# EAGLE board snake_game (EAGLE 6.3)
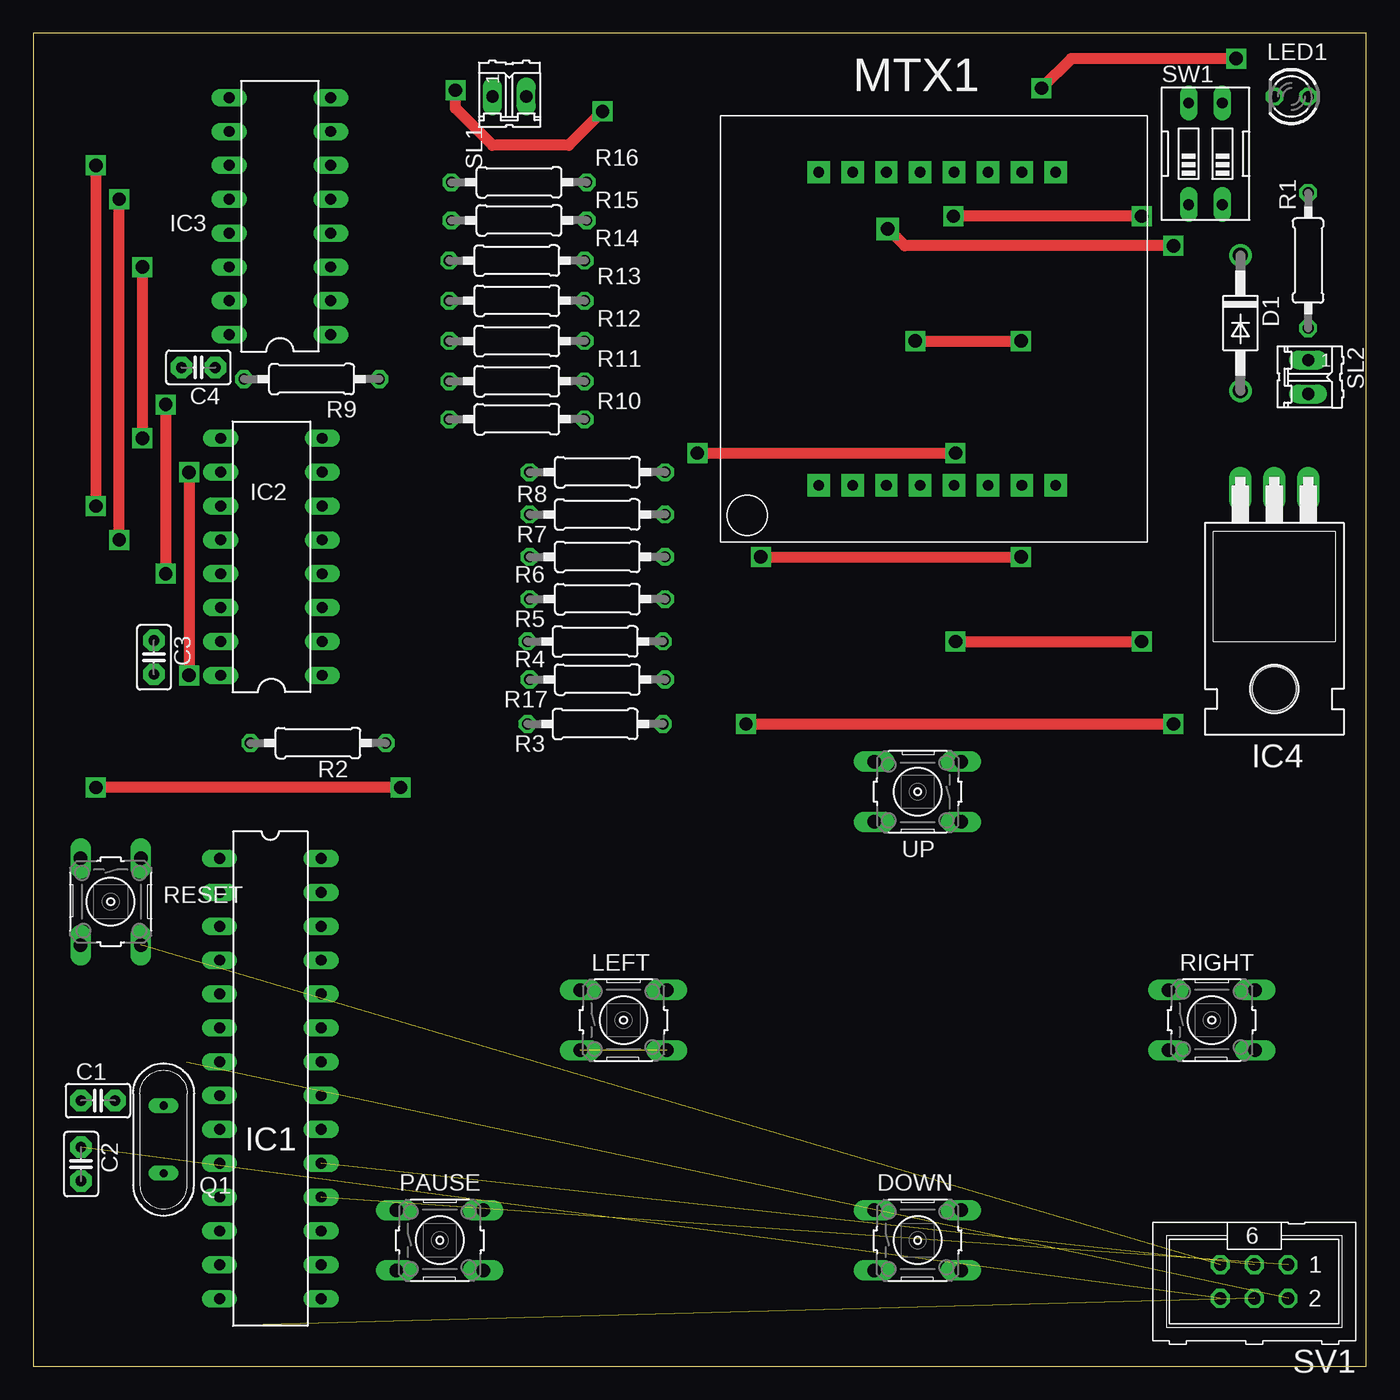
[diagram p0: board, top side]
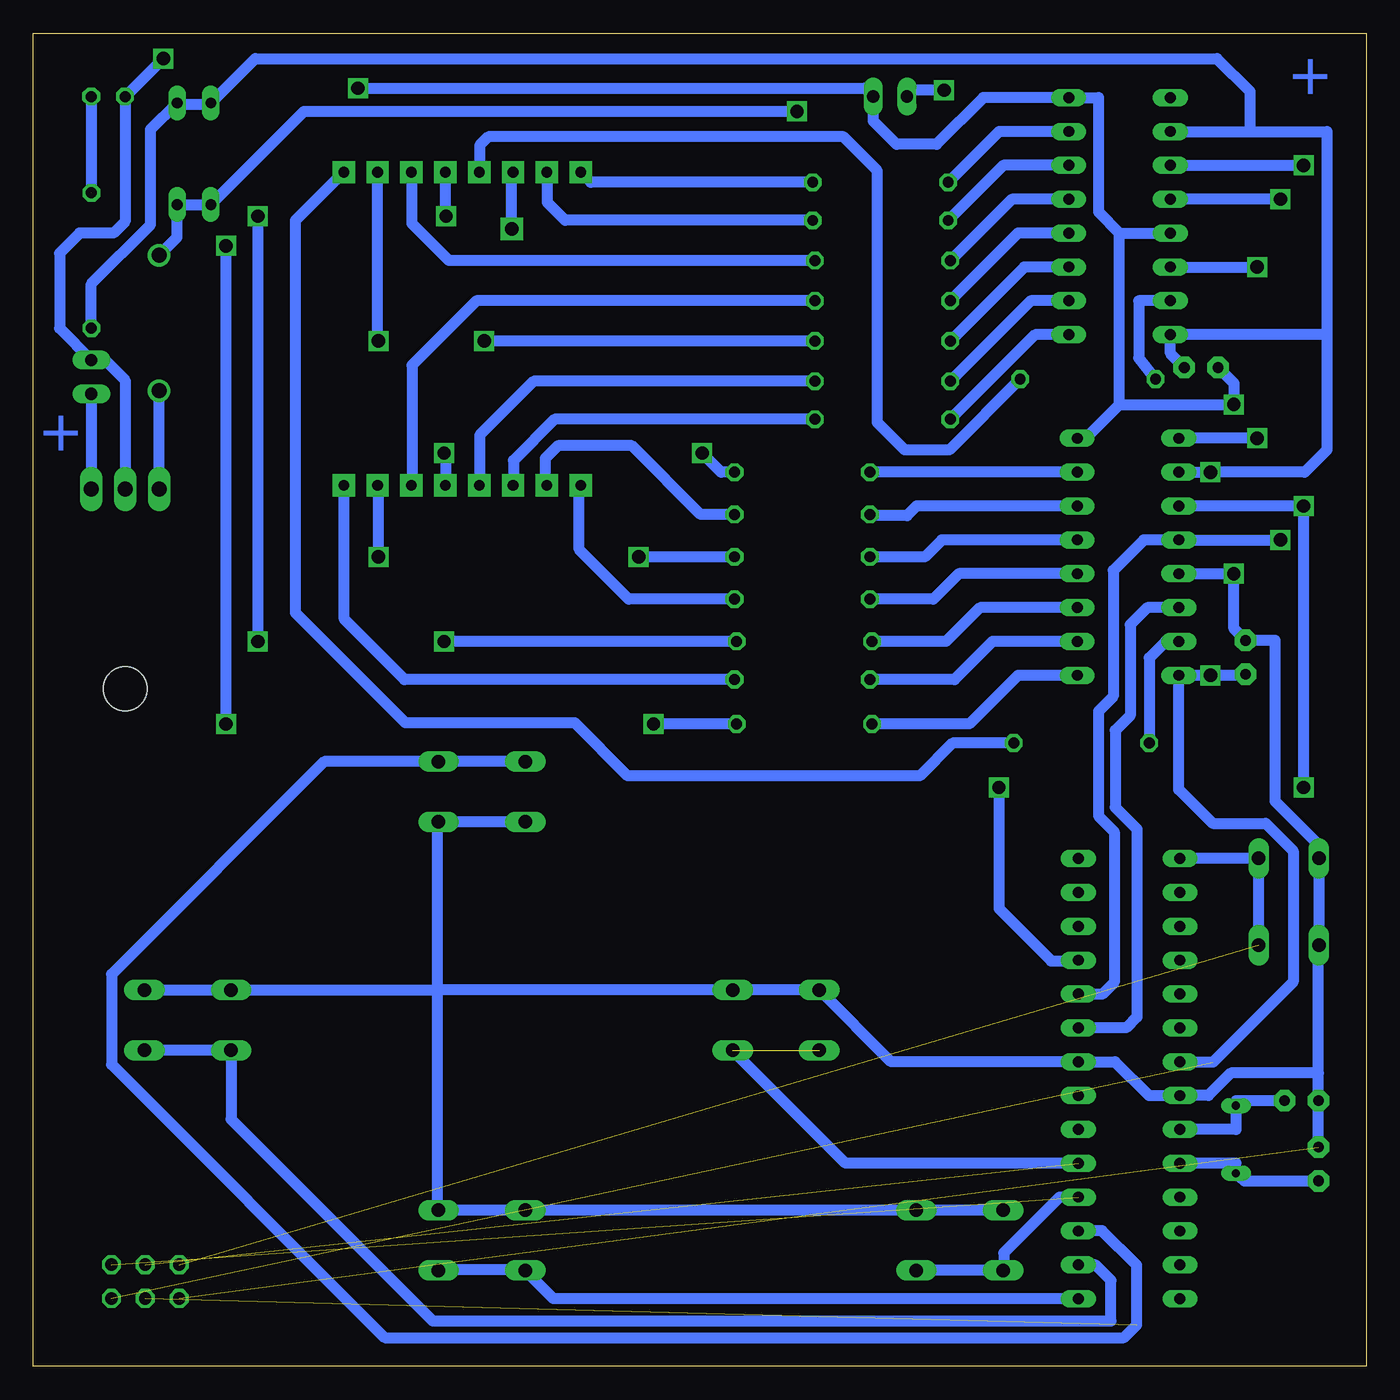
[diagram p1: board, bottom side, seen from below]

Size 100 x 100 mm. Coordinates in mm from the lower left corner, seen from the top.
Outline: 0,0 100,0 100,100 0,100 0,0
Copper layers (1*16): Top 0.035mm / dielectric 1.5mm / Bottom 0.035mm
Design rules "default *": minimum track width 10mil, minimum drill 24mil, track to track 16mil, track to pad 16mil, pad to pad 16mil, via to via 8mil, smd to smd 12mil, copper to edge 40mil, drill to drill 8mil, minimum pad ring 10mil, minimum via ring 8mil, stop-mask expansion 4mil, vias tented up to drill 0mil, thermal gap 10mil

## Footprints (pad centres in the part's own frame; a part is rotated, then mirrored left to right if it is on the bottom)
C2.5-2 = drill 0.813 pad 1.6 octagon: 1 -1.27,0; 2 1.27,0
DO41-10 = drill 1.118: A 5.08,0; C -5.08,0
B3F-10XX = drill 1.016 long: 1 -3.251,2.261; 2 3.251,2.261; 3 -3.251,-2.261; 4 3.251,-2.261
DIL28-3 = drill 0.813 long: 1 -16.51,-3.81; 2 -13.97,-3.81; 3 -11.43,-3.81; 4 -8.89,-3.81; 5 -6.35,-3.81; 6 -3.81,-3.81; 7 -1.27,-3.81; 8 1.27,-3.81; 9 3.81,-3.81; 10 6.35,-3.81; 11 8.89,-3.81; 12 11.43,-3.81; 13 13.97,-3.81; 14 16.51,-3.81; 15 16.51,3.81; 16 13.97,3.81; 17 11.43,3.81; 18 8.89,3.81; 19 6.35,3.81; 20 3.81,3.81; 21 1.27,3.81; 22 -1.27,3.81; 23 -3.81,3.81; 24 -6.35,3.81; 25 -8.89,3.81; 26 -11.43,3.81; 27 -13.97,3.81; 28 -16.51,3.81
DIL16 = drill 0.813 long: 1 -8.89,-3.81; 2 -6.35,-3.81; 3 -3.81,-3.81; 4 -1.27,-3.81; 5 1.27,-3.81; 6 3.81,-3.81; 7 6.35,-3.81; 8 8.89,-3.81; 9 8.89,3.81; 10 6.35,3.81; 11 3.81,3.81; 12 1.27,3.81; 13 -1.27,3.81; 14 -3.81,3.81; 15 -6.35,3.81; 16 -8.89,3.81
TO220H = drill 1.118 long: 1 -2.54,-10.16; 2 0,-10.16; 3 2.54,-10.16 | hole 3.302: 0,4.826
LED3MM = drill 0.813 octagon: A -1.27,0; K 1.27,0
MATRIX_8X8_CPM12088B = drill 0.8 pad 1.676 square: 1 7.36,4.25; 2 9.9,4.25; 3 12.44,4.25; 4 14.98,4.25; 5 17.52,4.25; 6 20.06,4.25; 7 22.6,4.25; 8 25.14,4.25; 9 25.14,27.75; 10 22.6,27.75; 11 20.06,27.75; 12 17.52,27.75; 13 14.98,27.75; 14 12.44,27.75; 15 9.9,27.75; 16 7.36,27.75
QS = drill 0.61 long: 1 -2.54,0; 2 2.54,0
0207/10 = drill 0.813 octagon: 1 -5.08,0; 2 5.08,0
02P = drill 0.914 long: 1 -1.27,0; 2 1.27,0
ML6 = drill 0.914 octagon: 1 -2.54,-1.27; 2 -2.54,1.27; 3 0,-1.27; 4 0,1.27; 5 2.54,-1.27; 6 2.54,1.27
EDG-02 = drill 0.813 long: 1 -1.27,-3.81; 2 1.27,-3.81; 3 1.27,3.81; 4 -1.27,3.81

## Placement (x,y rotation side)
C1  22pF  [C2.5-2]  4.85,19.93 0 top
C2  22pF  [C2.5-2]  3.58,15.16 270 top
C3  22pF  [C2.5-2]  9.05,53.18 270 top
C4  22pF  [C2.5-2]  12.38,74.93 180 top
D1  1N4001  [DO41-10]  90.57,78.26 270 top
DOWN  DOWN  [B3F-10XX]  66.35,9.45 0 top
IC1  MEGA8-P  [DIL28-3]  17.78,21.57 270 top
IC2  74HC595N  [DIL16]  17.87,60.73 90 top
IC3  74HC595N  [DIL16]  18.5,86.28 90 top
IC4  7805T  [TO220H]  93.11,55.64 180 top
LED1  Verde  [LED3MM]  94.39,95.25 180 top
LEFT  LEFT  [B3F-10XX]  44.28,25.96 0 top
MTX1  LED_DOT_MATRIX_8X8_CPM12088B  [MATRIX_8X8_CPM12088B]  51.57,61.84 0 top
PAUSE  PAUSE  [B3F-10XX]  30.5,9.45 0 top
Q1  16MHz  [QS]  9.77,17.01 90 top
R1  330R  [0207/10]  95.64,82.95 90 top
R2  220R  [0207/10]  21.36,46.76 0 top
R3  220R  [0207/10]  42.16,48.18 0 top
R4  220R  [0207/10]  42.16,54.38 0 top
R5  220R  [0207/10]  42.31,57.55 0 top
R6  220R  [0207/10]  42.31,60.73 0 top
R7  220R  [0207/10]  42.31,63.9 0 top
R8  220R  [0207/10]  42.31,67.08 0 top
R9  220R  [0207/10]  20.88,74.06 0 top
R10  220R  [0207/10]  36.28,71.04 0 top
R11  220R  [0207/10]  36.28,73.9 0 top
R12  220R  [0207/10]  36.28,76.92 0 top
R13  220R  [0207/10]  36.28,79.93 0 top
R14  220R  [0207/10]  36.28,82.95 0 top
R15  220R  [0207/10]  36.44,85.97 0 top
R16  220R  [0207/10]  36.44,88.82 0 top
R17  220R  [0207/10]  42.31,51.52 0 top
RESET  RESET  [B3F-10XX]  5.8,34.85 270 top
RIGHT  RIGHT  [B3F-10XX]  88.41,25.96 0 top
SL1  Alimentacao 5V  [02P]  35.72,95.26 0 top
SL2  Alimentacao Regulada  [02P]  95.65,74.22 270 top
SV1  ISP  [ML6]  91.6,6.35 180 top
SW1  [EDG-02]  87.95,90.96 0 top
UP  UP  [B3F-10XX]  66.35,43.1 180 top

## Library data of the parts
C1-C4 = capacitor-wima
D1 = diode
DOWN LEFT PAUSE RESET RIGHT UP = switch-omron; MPN: B3F-1000; OC_FARNELL: 176432; OC_NEWARK: 36M3542
IC1 = atmel; OC_FARNELL: unknown; OC_NEWARK: unknown
IC2 IC3 = 74xx-eu
IC4 = linear
LED1 = led
MTX1 = leddotmatrix8x8
Q1 SW1 = special
R1-R17 = rcl
SL1 SL2 = con-amp-quick; OC_FARNELL: unknown; OC_NEWARK: unknown
SV1 = con-ml; OC_FARNELL: unknown; OC_NEWARK: unknown

## Nets
AVCC: IC1.20
GND: C1.1 C2.1 C3.1 C4.2 DOWN.1 DOWN.2 IC1.8 IC1.22 IC2.8 IC2.13 IC3.8 IC3.13 IC4.2 LED1.K LEFT.1 LEFT.2 PAUSE.1 PAUSE.2 RESET.3 RESET.4 RIGHT.1 RIGHT.2 SL1.2 SL2.1 SV1.6 UP.1 UP.2
N$1: MTX1.9 R2.2
N$2: IC1.1 RESET.1 RESET.2 SV1.5
N$3: C2.2 IC1.10 Q1.1
N$4: C1.2 IC1.9 Q1.2
N$5: IC1.19 LEFT.3 LEFT.4 SV1.3
N$7: DOWN.3 DOWN.4 IC1.15
N$9: IC1.16 RIGHT.3 RIGHT.4
N$11: IC1.17 SV1.4 UP.3 UP.4
N$12: IC4.1 SL2.2
N$13: IC1.18 PAUSE.3 PAUSE.4 SV1.1
N$14: D1.A IC4.3
N$15: IC1.23 IC2.14
N$16: IC1.24 IC2.12 IC3.12
N$17: IC1.25 IC2.11 IC3.11
N$18: D1.C SL1.1 SW1.1 SW1.2
N$19: LED1.A R1.2
N$20: IC2.9 IC3.14
N$21: MTX1.14 R3.2
N$22: MTX1.8 R17.2
N$23: MTX1.12 R4.2
N$24: MTX1.1 R5.2
N$25: MTX1.7 R6.2
N$26: MTX1.2 R7.2
N$27: IC2.7 R8.1
N$28: MTX1.13 R9.2
N$29: MTX1.3 R10.2
N$30: MTX1.4 R11.2
N$31: MTX1.10 R12.2
N$32: MTX1.6 R13.2
N$33: MTX1.11 R14.2
N$34: MTX1.15 R15.2
N$35: MTX1.16 R16.2
N$36: IC3.7 R16.1
N$37: IC2.15 R2.1
N$38: IC3.6 R15.1
N$39: IC3.5 R14.1
N$40: IC3.4 R13.1
N$41: IC3.3 R12.1
N$42: IC3.2 R11.1
N$43: IC3.1 R10.1
N$44: IC3.15 R9.1
N$45: IC2.1 R3.1
N$46: IC2.3 R4.1
N$47: IC2.4 R5.1
N$48: IC2.5 R6.1
N$49: IC2.6 R7.1
N$50: MTX1.5 R8.2
N$51: IC2.2 R17.1
VCC: C3.2 C4.1 IC1.7 IC2.10 IC2.16 IC3.10 IC3.16 R1.1 SV1.2 SW1.3 SW1.4

## Tracks (layer width: path | path; a pad name or v marks a point on that pad's centre or on a via)
GND  (via drill 1, 1 pad 1.42)  (1 unrouted)
  Top 0.813: v9.93,72.16 v9.93,59.45 | v90.25,98.11 77.87,98.11 v75.64,95.89
  Bottom 0.813: UP.2 UP.1 69.68,40.76 69.68,28.18 | DOWN.1 63.29,11.71 | 63.29,11.71 DOWN.2 69.64,11.71 69.68,11.67 69.68,28.02 | RIGHT.2 RIGHT.1 69.88,28.22 69.68,28.02 | 69.68,28.02 69.68,28.18 | 69.68,28.18 69.64,28.22 LEFT.2 LEFT.1 35.65,22.84 IC1.22 18.84,22.84 16.3,20.3 IC1.8 11.84,20.3 10.15,21.99 3.58,21.99 | DOWN.1 PAUSE.2 PAUSE.1 | 63.29,11.71 63.01,11.67 63.01,11.79 DOWN.1 | C2.1 C1.1 3.58,21.99 | IC3.8 20.09,95.17 20.09,86.6 18.5,85.01 | 18.5,85.01 IC3.13 | IC2.8 21.04,69.61 18.5,72.16 | 18.5,72.16 18.5,85.01 | IC2.13 v9.93,59.45 9.93,55.33 C3.1 6.83,54.45 6.83,42.38 3.54,39.1 RESET.3 RESET.4 3.58,31.56 3.58,21.99 | 18.5,72.16 v9.93,72.16 9.93,73.75 C4.2 | IC4.2 93.11,73.98 94.61,75.49 SL2.1 98.03,77.87 98.03,83.5 96.52,85.01 93.98,85.01 93.11,85.88 LED1.K 93.11,95.48 92.88,95.48 v90.25,98.11 | IC3.8 | IC3.8 28.73,95.17 32.23,91.68 35.24,91.68 36.99,93.42 SL1.2 37.61,95.89 v75.64,95.89
N$1
  Bottom 0.813: R2.2 31.03,46.76 33.5,44.29 55.4,44.29 59.37,48.26 72.07,48.26 80.33,56.52 80.33,85.97 MTX1.9
N$2  (1 unrouted)
  Bottom 0.813: RESET.2 RESET.1 13.85,38.1 IC1.1
N$3
  Bottom 0.813: IC1.10 9.77,15.22 Q1.1 9.14,13.89 C2.2
N$4
  Bottom 0.813: IC1.9 9.77,17.76 Q1.2 9.77,19.93 C1.2
N$5  (2 unrouted)
  Bottom 0.813: IC1.19 39.06,15.22 LEFT.4
N$7
  Bottom 0.813: DOWN.4 69.56,7.23 63.06,7.23 DOWN.3 60.97,5.06 IC1.15
N$9
  Bottom 0.813: 85.17,23.69 RIGHT.3 | 85.17,23.69 91.65,23.69 RIGHT.4 | 85.17,23.69 85.17,18.53 70.04,3.4 19.14,3.4 19.14,6.44 20.3,7.6 IC1.16
N$11  (1 unrouted)
  Bottom 0.813: UP.4 UP.3 78.16,45.36 94.13,29.4 94.13,22.63 73.64,2.15 18.17,2.15 17.22,3.1 17.22,7.57 19.81,10.16 21.57,10.16 IC1.17
N$12
  Bottom 0.813: SL2.2 IC4.1
N$13  (1 unrouted)
  Bottom 0.813: PAUSE.4 PAUSE.3 27.2,7.24 27.2,8.5 23.02,12.68 IC1.18
N$14
  Bottom 0.813: IC4.3 D1.A
N$15
  Bottom 0.813: IC2.14 16.42,56.91 17.71,55.62 17.71,48.82 18.82,47.71 18.82,41.92 17.2,40.3 17.2,26.2 18,25.4 21.57,25.4 IC1.23
N$16  (via drill 1)
  Top 0.813: v6.44,61.99 v6.44,87.55
  Bottom 0.813: v6.44,61.99 IC2.12 16.69,61.99 18.98,59.71 18.98,50.25 20.09,49.14 20.09,41.29 18.9,40.1 18.9,28.8 19.8,27.9 21.57,27.9 IC1.24 | v6.44,87.55 IC3.12
N$17  (via drill 1)
  Top 0.813: v27.55,43.42 v4.69,43.42 | v4.69,90.09 v4.69,64.53
  Bottom 0.813: v4.69,43.42 v4.69,64.53 IC2.11 | IC3.11 v4.69,90.09 | 21.65,30.3 IC1.25 | 21.75,30.3 IC1.25 | v27.55,43.42 27.55,34.33 23.63,30.4 21.65,30.4 IC1.25
N$18  (via drill 1 pad 1.42)
  Top 0.813: v42.7,94.14 40.16,91.6 34.45,91.6 31.67,94.38 v31.67,95.73
  Bottom 0.813: D1.C 89.22,84.69 SW1.2 SW1.1 79.69,94.14 v42.7,94.14 | v31.67,95.73 33.98,95.73 arc-90 SL1.1
N$19  (1 unrouted)
  Bottom 0.813: LED1.A 95.66,88.05
N$20  (via drill 1)
  Top 0.813: v8.18,82.47 v8.18,69.61
  Bottom 0.813: IC3.14 v8.18,82.47 | v8.18,69.61 IC2.9
N$21  (via drill 1, 1 pad 1.68)
  Top 0.813: v53.47,48.18 v85.54,48.18 | v85.54,84.06 65.38,84.06 v64.11,85.33
  Bottom 0.813: R3.2 v53.47,48.18 | v85.54,48.18 v85.54,84.06 | v64.11,85.33 64.11,89.48 MTX1.14
N$22
  Bottom 0.813: R17.2 72.16,51.52 76.68,56.04 76.68,66.06 MTX1.8
N$23  (via drill 1)
  Top 0.813: v69.19,54.38 v83.16,54.38 | v83.16,86.28 v69.03,86.28
  Bottom 0.813: R4.2 v69.19,54.38 | v69.03,86.28 69.09,86.34 MTX1.12 | v83.16,86.28 v83.16,54.38
N$24
  Bottom 0.813: R5.2 55.33,57.55 59.05,61.28 59.05,65.96 MTX1.1
N$25  (via drill 1)
  Top 0.813: v54.58,60.73 v74.11,60.73
  Bottom 0.813: v74.11,60.73 74.11,66.03 MTX1.7 | R6.2 v54.58,60.73
N$26
  Bottom 0.813: R7.2 49.93,63.9 55.09,69.06 60.64,69.06 61.59,68.1 61.59,66.22 MTX1.2
N$27
  Bottom 0.813: IC2.7 R8.1
N$28
  Bottom 0.813: R9.2 31.27,68.74 34.61,68.74 36.67,70.8 36.67,89.69 39.21,92.23 65.88,92.23 66.52,91.6 66.52,89.62 MTX1.13
N$29
  Bottom 0.813: R10.2 60.88,71.04 63.98,67.94 63.98,66.12 MTX1.3
N$30
  Bottom 0.813: R11.2 62.47,73.9 66.52,69.85 66.52,66.12 MTX1.4
N$31  (via drill 1)
  Top 0.813: v66.17,76.92 v74.11,76.92
  Bottom 0.813: R12.2 v66.17,76.92 | v74.11,76.92 74.17,76.82 MTX1.10
N$32
  Bottom 0.813: R13.2 66.75,79.93 71.6,75.09 71.6,66.12 MTX1.6
N$33
  Bottom 0.813: 71.57,89.53 MTX1.11 71.6,89.56 71.6,85.72 68.82,82.95 R14.2
N$34
  Bottom 0.813: R15.2 60.09,85.97 61.44,87.31 61.44,89.56 MTX1.15
N$35
  Bottom 0.813: R16.2 58.16,88.82 MTX1.16
N$36
  Bottom 0.813: IC3.7 27.55,92.63 R16.1
N$37
  Bottom 0.813: IC2.15 15.04,54.38 16.28,53.14 R2.1
N$38
  Bottom 0.813: IC3.6 27.23,90.09 R15.1
N$39
  Bottom 0.813: IC3.5 26.6,87.55 R14.1
N$40
  Bottom 0.813: IC3.4 26.12,85.01 R13.1
N$41
  Bottom 0.813: IC3.3 25.65,82.47 R12.1
N$42
  Bottom 0.813: IC3.2 25.17,79.93 R11.1
N$43
  Bottom 0.813: IC3.1 24.85,77.39 R10.1
N$44
  Bottom 0.813: IC3.15 17.07,79.93 17.07,75.65 R9.1
N$45
  Bottom 0.813: IC2.1 26.12,51.84 29.77,48.18 R3.1
N$46
  Bottom 0.813: IC2.3 28.98,56.91 31.52,54.38 R4.1
N$47
  Bottom 0.813: IC2.4 30.57,59.45 32.47,57.55 R5.1
N$48
  Bottom 0.813: IC2.5 31.84,61.99 33.11,60.73 R6.1
N$49
  Bottom 0.813: IC2.6 33.73,64.53 34.45,63.82 37.15,63.82 R7.1
N$50  (via drill 1)
  Top 0.813: v49.82,68.5 v69.19,68.5
  Bottom 0.813: v69.19,68.5 69.09,68.29 MTX1.5 | R8.2 48.39,67.08 v49.82,68.5
N$51
  Bottom 0.813: IC2.2 28.03,54.38 30.89,51.52 R17.1
VCC  (via drill 1)  (1 unrouted)
  Top 0.813: v11.68,67.08 v11.68,51.84
  Bottom 0.813: 2.95,92.63 2.94,77.39 | 2.94,77.39 IC3.16 14.69,75.97 C4.1 | IC3.10 8.73,92.63 | 8.73,92.63 2.95,92.63 | IC2.10 v11.68,67.08 4.61,67.08 2.94,68.74 2.94,77.39 | 2.95,92.63 | IC1.7 13.93,22.8 11.5,22.8 5.49,28.82 5.49,38.66 7.55,40.72 11.52,40.72 14.06,43.26 IC2.16 v11.68,51.84 9.12,51.84 C3.2 | R1.1 95.64,81.2 91.2,85.65 91.2,92.79 SW1.3 89.3,94.77 89.38,94.69 86.76,94.69 SW1.4 83.34,98.11 11.19,98.11 8.73,95.65 8.73,92.63

## Text on the board
Bottom: + | +